# Altium PCB PCB1.PcbDoc
Units mm, origin at the board's own origin, x right, y up, seen from the top; angles counter-clockwise.
Board outline 100 x 90 mm, 2 copper layers (Top Layer, Bottom Layer); 72 components, 52 nets, 262 pads, 12 vias.
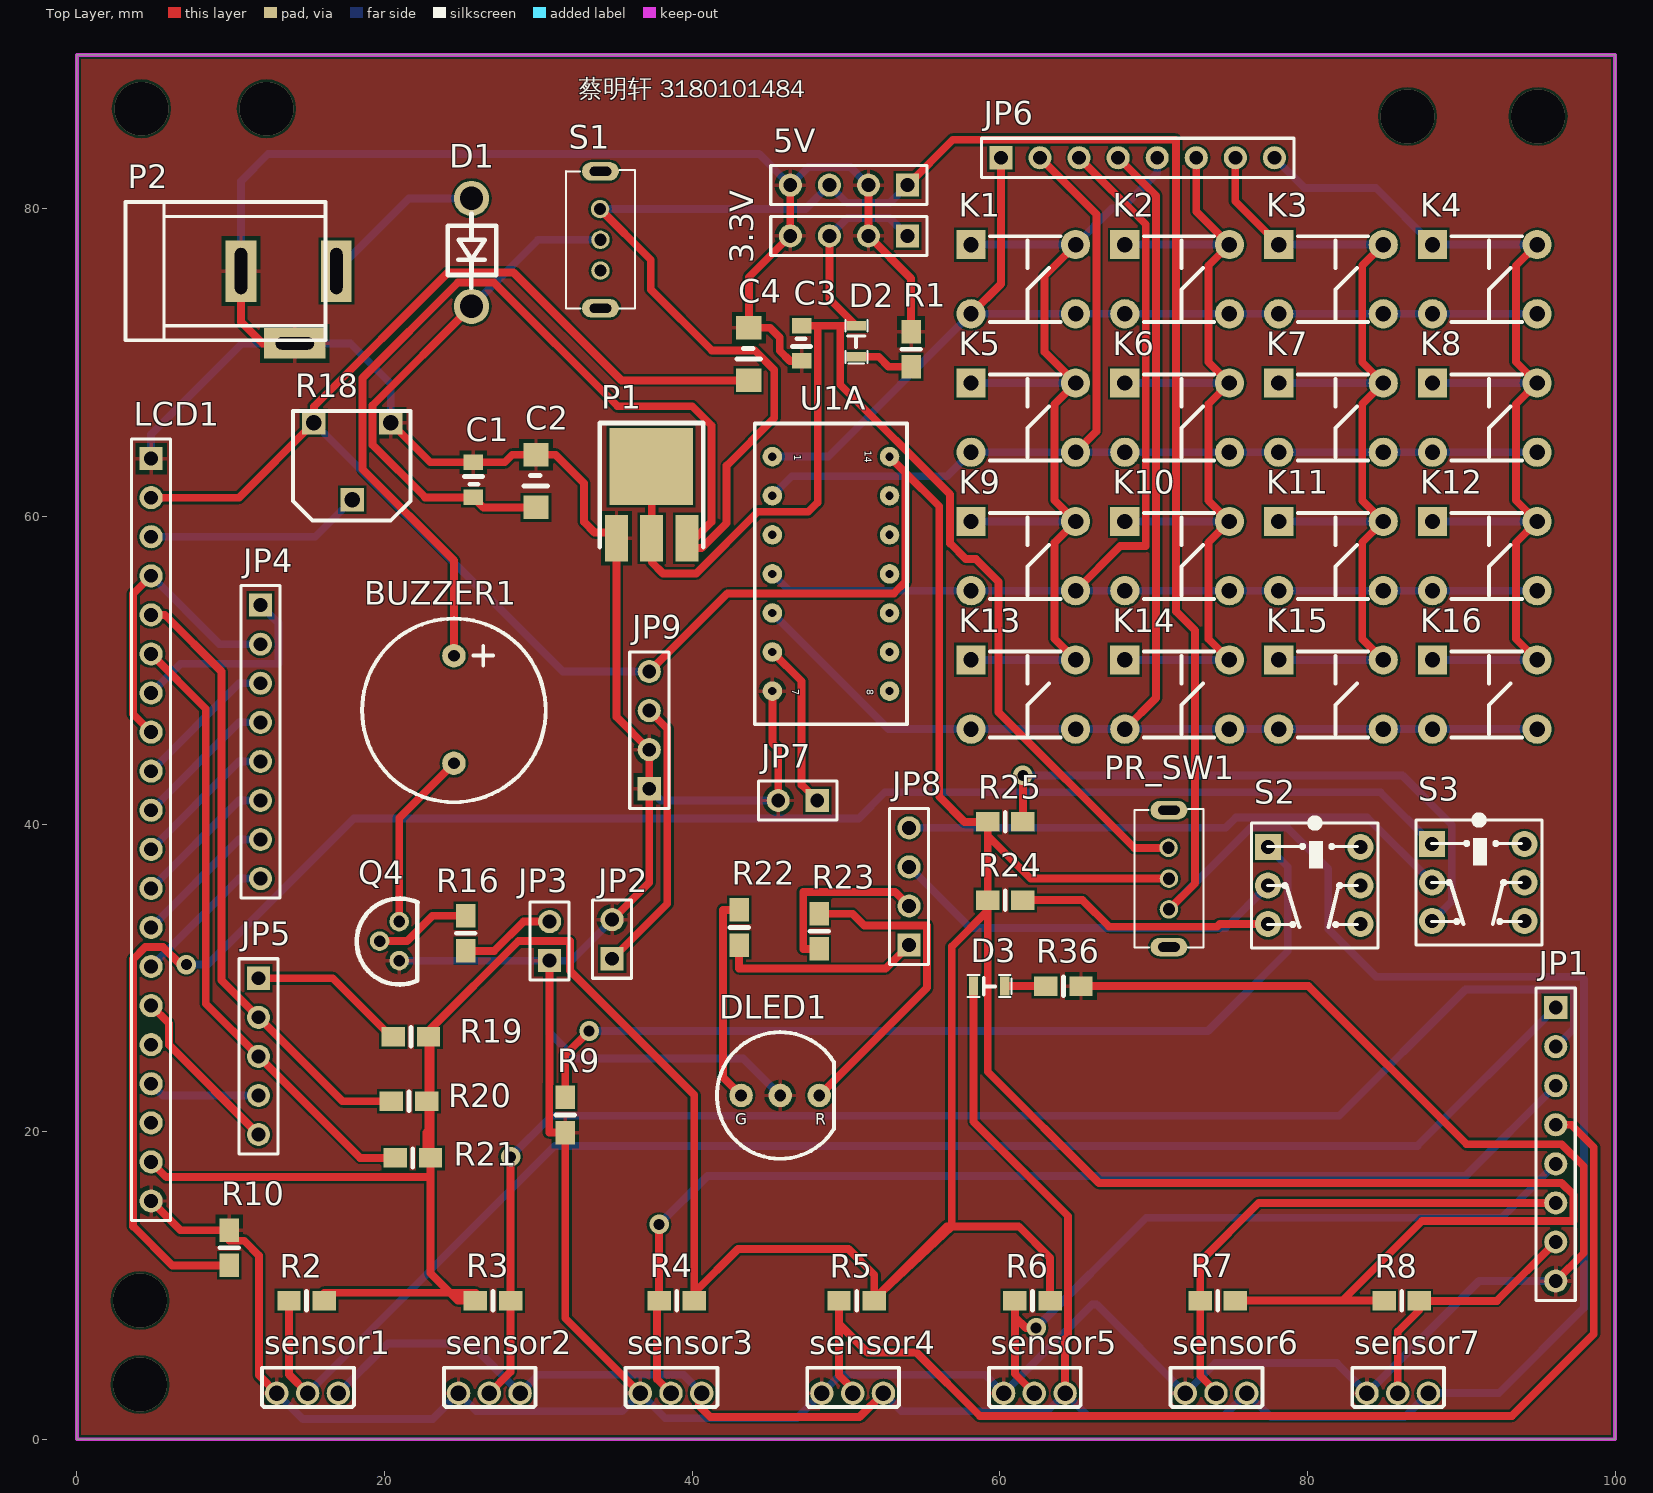
[diagram p0: Top Layer view]
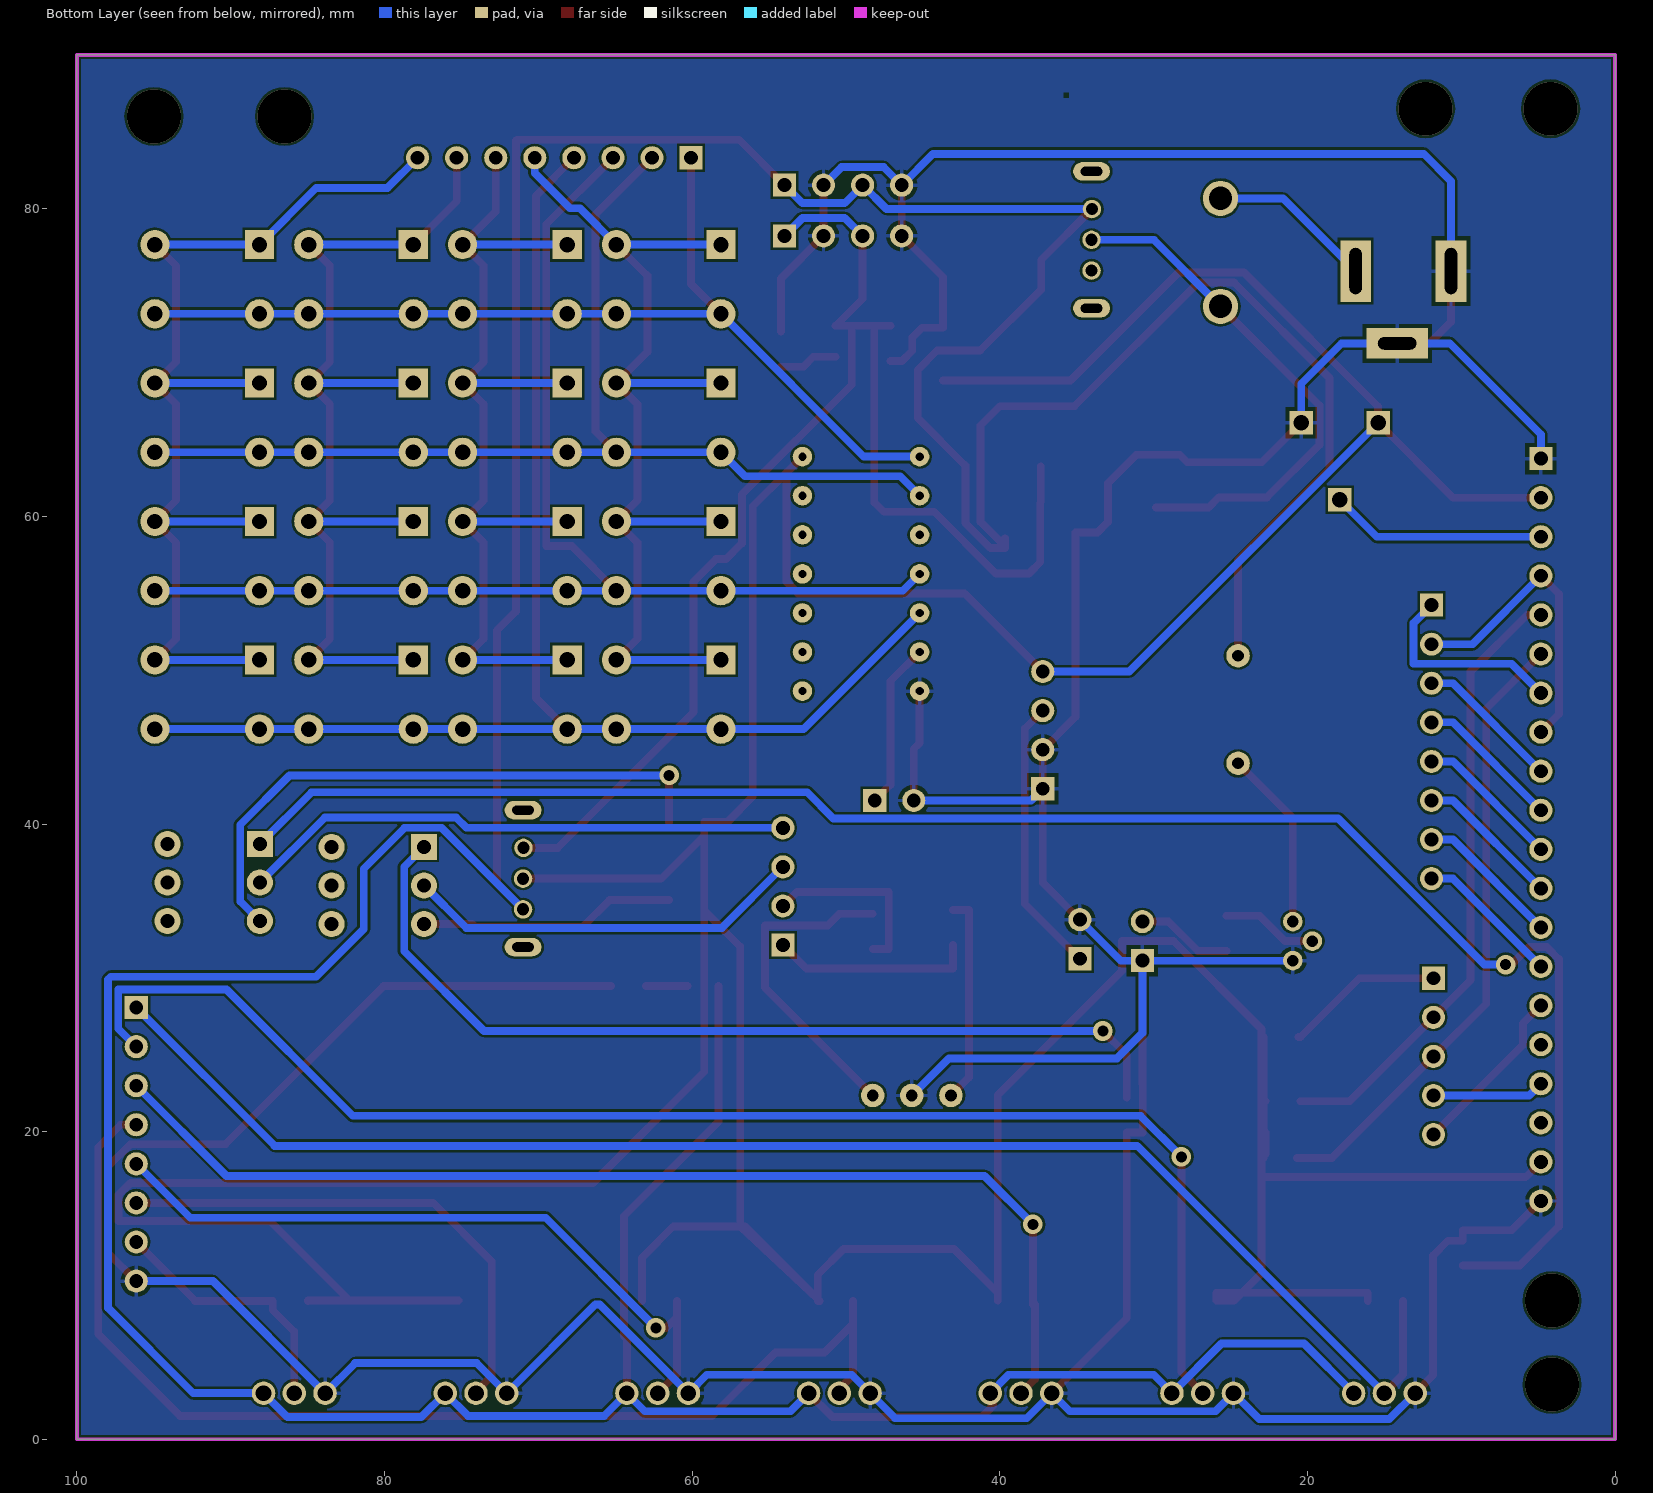
[diagram p1: Bottom Layer view, seen from below]
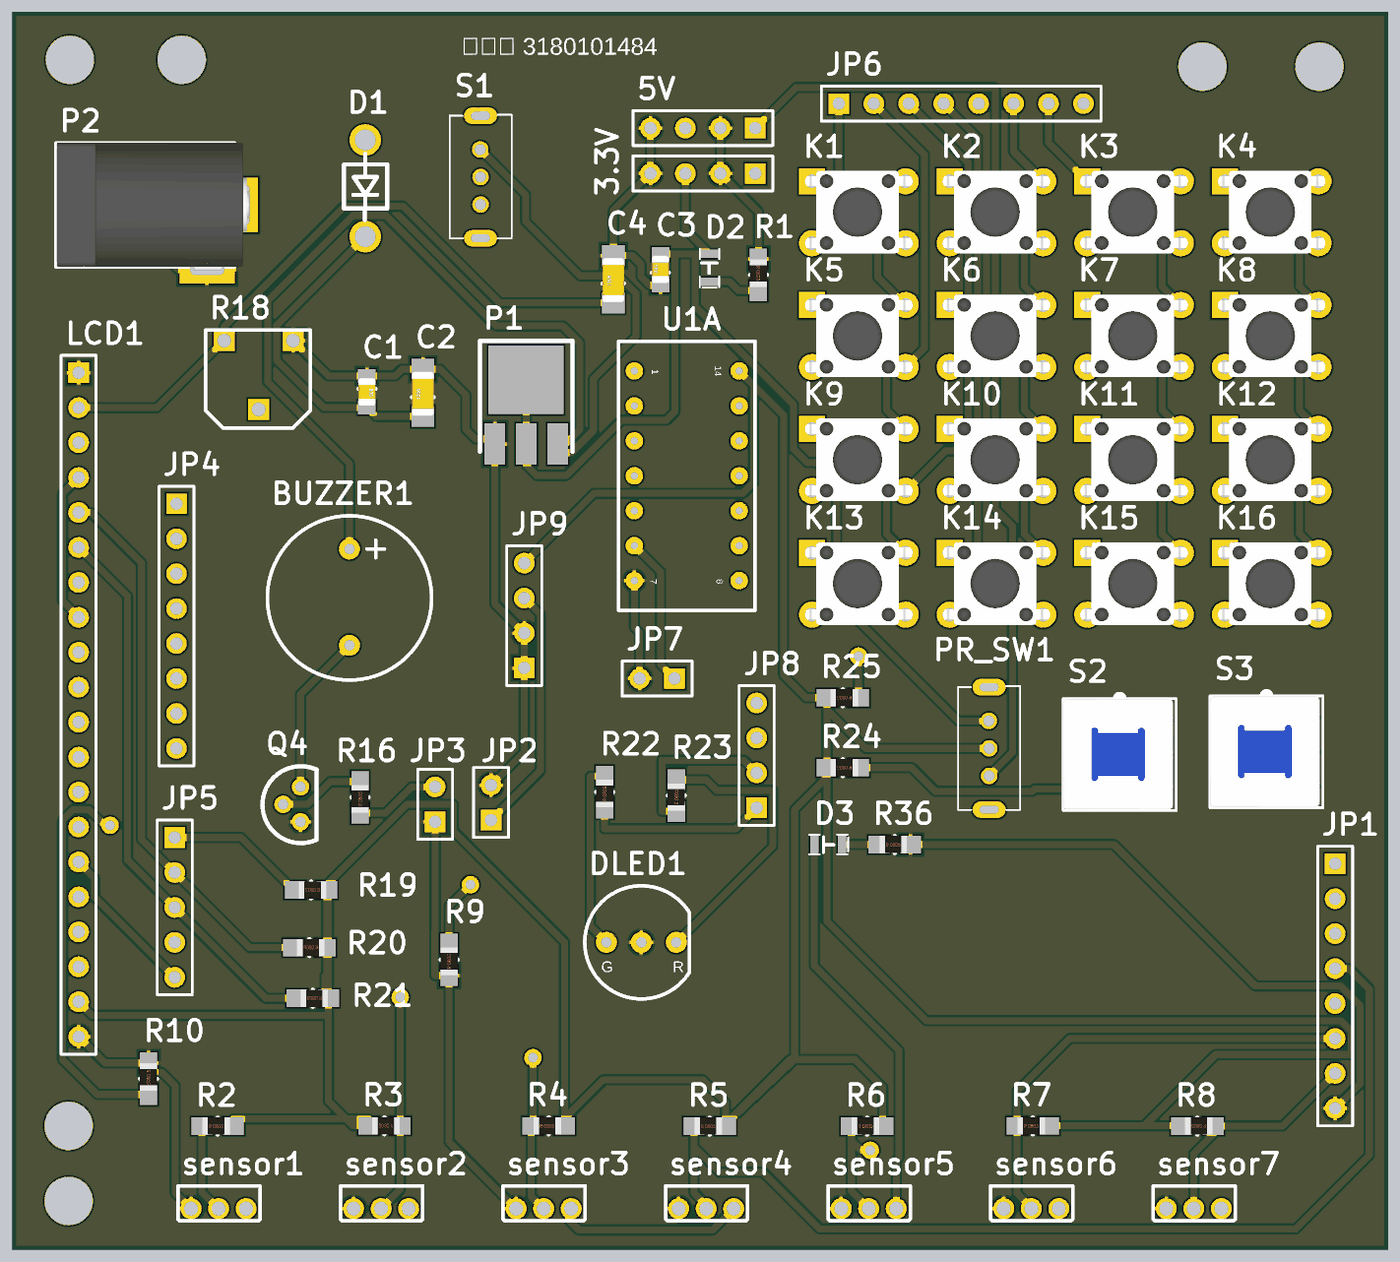
[diagram p2: 3D render of the assembled board from above, using the file's embedded part models]

## Layer stack, top to bottom
Top Solder: solder mask 0.0102, Solder Resist, Dk 3.5
Top Layer: signal copper 0.0356
Dielectric 1: dielectric 0.32, FR-4, Dk 4.8
Bottom Layer: signal copper 0.0356
Bottom Solder: solder mask 0.0102, Solder Resist, Dk 3.5

## Board outline
0,0 0,90 100,90 100,0

## Design rules (kind name [scope] priority, off if disabled: settings)
Clearance [All] p1: gap=0.152 ignorepadtopadclearanceinfootprint=FALSE
HoleSize [All] p1 off: absolutevalues=TRUE maxlimit=2.54 minlimit=0.025 maxpercent=80.000 minpercent=20.000
PolygonConnect [All] p1: connectstyle=Relief reliefconductorwidth=0.254 reliefentries=4 polygonreliefangle="90 Angle" airgapwidth=0.254
RoutingVias [All] p1: holewidth=0.711 width=1.27 viastyle="Through Hole" minholewidth=0.711 minwidth=1.27 maxholewidth=0.711 maxwidth=1.27
SMDNeckDown [All] p1: percent=100.000
SilkToSilkClearance [All] p1 off: silktosilkclearance=0.254
SilkToSolderMaskClearance [IsPad] p1 off: minsilkscreentomaskgap=0.254 clearancetoexposedcopper=TRUE
SolderMaskExpansion [All] p1: expansion=0.102
Width [All] p1: maxlimit=0.508 minlimit=0.508 preferedwidth=0.508
27 further rules are at their usual default settings.

## Components (designator, comment, footprint, x,y, rotation, side; value= is the part's Value field where it differs from the comment)
3.3V "3.3V" HDR1X4 54,78.232 r180 top
5V "GND" HDR1X4 54,81.534 r180 top
BUZZER1 "Bell" BUZZER 24.511,50.942 r270 top
C1 "0.1uF" 0805C 25.781,63.5 r270 top
C2 "10uF" 1206C 29.845,60.579 r90 top
C3 "0.1uF" 0805C 47.107,70.122 r90 top
C4 "10uF" 1206C 43.688,68.834 r90 top
D1 "1N4147" DIODE0.3 25.654,80.645 r270 top
D2 "3.3V_LED" LED0805 50.673,72.39 r270 top
D3 "5V_LED" LED0805 58.293,29.464 r0 top
DLED1 "DLED" "DColor LED" 45.72,22.352 r0 top
JP1 "OPT_I/O" HDR1X8 96.139,28.067 r270 top
JP2 "DA" HDR1X2 34.798,31.242 r90 top
JP3 "BEEP" HDR1X2 30.734,31.115 r90 top
JP4 "LCD_DATA" HDR1X8 11.938,54.229 r270 top
JP5 "LCD_CTRL" HDR1X5 11.811,29.972 r270 top
JP6 "KEY_PORT" HDR1X8 60.071,83.312 r0 top
JP7 "K_INT" HDR1X2 48.133,41.529 r180 top
JP8 "LED_SW" HDR1X4 54.102,32.131 r90 top
JP9 "喇叭驱动模块" HDR1X4 37.211,42.291 r90 top
K1 "KEY_01" DIP-6X6X5 58.127,77.667 r0 top
K2 "KEY_02" DIP-6X6X5 68.127,77.667 r0 top
K3 "KEY_03" DIP-6X6X5 78.127,77.667 r0 top
K4 "KEY_04" DIP-6X6X5 88.127,77.667 r0 top
K5 "KEY_05" DIP-6X6X5 58.127,68.667 r0 top
K6 "KEY_06" DIP-6X6X5 68.127,68.667 r0 top
K7 "KEY_07" DIP-6X6X5 78.127,68.667 r0 top
K8 "KEY_08" DIP-6X6X5 88.127,68.667 r0 top
K9 "KEY_09" DIP-6X6X5 58.127,59.667 r0 top
K10 "KEY_10" DIP-6X6X5 68.127,59.667 r0 top
K11 "KEY_11" DIP-6X6X5 78.127,59.667 r0 top
K12 "KEY_12" DIP-6X6X5 88.127,59.667 r0 top
K13 "KEY_13" DIP-6X6X5 58.127,50.667 r0 top
K14 "KEY_14" DIP-6X6X5 68.127,50.667 r0 top
K15 "KEY_15" DIP-6X6X5 78.127,50.667 r0 top
K16 "KEY_16" DIP-6X6X5 88.127,50.667 r0 top
LCD1 "LCD" HDR1X20 4.826,63.754 r270 top
P1 "NCP1117-3.3" DPAK1 35.077,58.598 r0 top
P2 "DC5" DC-005 16.868,75.946 r180 top
PR_SW1 "SS12D07VG5" SS12D07VG3 70.993,34.449 r90 top
Q4 "2N3904" TO-92A 20.955,33.655 r270 top
R1 "5.1K" 0805R 54.229,72.009 r270 top
R2 "10K" 0805R 13.789,9 r0 top
R3 "10K" 0805R 28.194,9.017 r180 top
R4 "10K" 0805R 37.846,9.017 r0 top
R5 "10K" 0805R 49.546,9 r0 top
R6 "10K" 0805R 60.979,9 r0 top
R7 "10K" 0805R 73.025,9.017 r0 top
R8 "10K" 0805R 87.266,9 r180 top
R9 "5.1K" 0805R 31.75,19.939 r90 top
R10 "5.1K" 0805R 9.906,13.589 r270 top
R16 "5.1K" 0805R 25.273,31.75 r90 top
R18 "蓝白电位器" RM065 20.407,66.087 r180 top value=10K
R19 "5.1K" 0805R 22.86,26.162 r180 top
R20 "5.1K" 0805R 22.733,21.971 r180 top
R21 "5.1K" 0805R 22.987,18.288 r180 top
R22 "330" 0805R 43.053,32.131 r90 top
R23 "5.1K" 0805R 48.26,31.877 r90 top
R24 "5.1K" 0805R 61.5,35.052 r180 top
R25 "5.1K" 0805R 61.5,40.132 r180 top
R36 "5.1K" 0805R 62.992,29.464 r0 top
S1 "SS12D07VG5" SS12D07VG3 34.036,75.978 r90 top
S2 "8*8mm自锁开关" "KFT DIP-8X8" 77.439,38.5 r0 top
S3 "8*8mm自锁开关" "KFT DIP-8X8" 88.107,38.695 r0 top
sensor1 "IS0103" IS0103 17,3 r180 top
sensor2 "IS0103" IS0103 28.811,3 r180 top
sensor3 "IS0103" IS0103 40.622,3 r180 top
sensor4 "IS0103" IS0103 52.433,3 r180 top
sensor5 "IS0103" IS0103 64.244,3 r180 top
sensor6 "IS0103" IS0103 76.055,3 r180 top
sensor7 "IS0103" IS0103 87.866,3 r180 top
U1A "SN74HC21" 74HC21D 45.212,63.881 r270 top

## Footprints (in the part's own frame and the unit in brackets; to place one, negate y for a bottom-side part, rotate by r counter-clockwise, add the part's x,y. Pads: shape width x height; smd on the part's side, far side on the other; paste and mask are expansions set on the pad)
74HC21D [mil] "SN74HC21D"
  round 50 hole 21: 1(0,0) 2(100,0) 3(200,0) 4(300,0) 5(400,0) 6(500,0) 7(600,0) 8(600,300) 9(500,300) 10(400,300) 11(300,300) 12(200,300) 13(100,300) 14(0,300)
  silkscreen extent -85,-45 685,345
0805C [mm]
  rect 1x1.27 smd: 1(-0.018,-0.01) 2(2.268,-0.01)
  silkscreen extent 0.91,-0.6 1.42,0.61, body extent 0.14,-0.62 2.14,0.63, height 0.78
0805R [mil]
  rect 60x50 smd: 1(0,0) 2(90,0)
  silkscreen extent 45,-24 45,24, body extent 1,-25 80,25, height 15
1206C [mil]
  rect 60x64.96 smd: 1(0,0) 2(135,0)
  silkscreen extent 55,-30 82,31, body extent 2,-31 128,32, height 39
BUZZER [mil]
  round 60 hole 30: 1(0,0) 2(275.59,0)
  silkscreen extent -95,-235 375,235
DC-005 [mm]
  rect 2x4 hole 0.8 slot 3 at 90 deg: 1(0,0) 2(6.2,0)
  rect 4x2 hole 0.8 slot 2.5 at 0 deg: 3(2.7,4.7)
  silkscreen extent 0.72,-4.5 13.7,4.5, body extent -0.4,-4.52 13.65,4.78, height 11.2
"DColor LED" [mil]
  round 60 hole 30: 1(0,0) 2(-100,0) 3(100,0)
  silkscreen extent -162,-162 138,162
DIODE0.3 [mil]
  round 90 hole 60: 1(-1,0) 2(275.59,0)
  silkscreen extent 39,-61 228,63, body extent 36,-61 233,66, height 118
DIP-6X6X5 [mm]
  rect 1.9x1.9 hole 1: 1(0,0)
  round 1.9 hole 1: 2(6.8,0) 3(6.8,-4.5) 4(0,-4.5)
  silkscreen extent 1.24,-5.04 5.81,0.54, body extent -0.8,-5.24 7.41,0.76, height 4.95
DPAK1 [mm]
  rect 1.5x3 smd: 1(0,-0.025) 2(2.29,-0.025) 3(4.58,-0.025)
  rect 5.45x5 smd: 4(2.261,4.648)
  silkscreen extent -1.09,-0.58 5.64,7.47, body extent -1.11,1.37 5.66,7.53, height 2.8
HDR1X2 [mm]
  rect 1.5x1.5 hole 0.9: 1(0,0)
  round 1.5 hole 0.9: 2(2.54,0)
  silkscreen extent -1.27,-1.27 3.81,1.27
HDR1X4 [mm]
  rect 1.5x1.5 hole 0.9: 1(0,0)
  round 1.5 hole 0.9: 2(2.54,0) 3(5.08,0) 4(7.62,0)
  silkscreen extent -1.27,-1.27 8.89,1.27
HDR1X5 [mm]
  rect 1.5x1.5 hole 0.9: 1(0,0)
  round 1.5 hole 0.9: 2(2.54,0) 3(5.08,0) 4(7.62,0) 5(10.16,0)
  silkscreen extent -1.27,-1.27 11.43,1.27
HDR1X8 [mm]
  rect 1.5x1.5 hole 0.9: 1(0,0)
  round 1.5 hole 0.9: 2(2.54,0) 3(5.08,0) 4(7.62,0) 5(10.16,0) 6(12.7,0) 7(15.24,0) 8(17.78,0)
  silkscreen extent -1.27,-1.27 19.05,1.27
HDR1X20 [mm]
  rect 1.5x1.5 hole 0.9: 1(0,0)
  round 1.5 hole 0.9: 2(2.54,0) 3(5.08,0) 4(7.62,0) 5(10.16,0) 6(12.7,0) 7(15.24,0) 8(17.78,0) 9(20.32,0) 10(22.86,0) 11(25.4,0) 12(27.94,0) 13(30.48,0) 14(33.02,0) 15(35.56,0) 16(38.1,0) 17(40.64,0) 18(43.18,0) 19(45.72,0) 20(48.26,0)
  silkscreen extent -1.27,-1.27 49.53,1.27
IS0103 [mil]
  round 60 hole 40: 1(0,0) 2(78.74,0) 3(157.48,0)
  silkscreen extent -40,-65 195,35
"KFT DIP-8X8" [mm]
  rect 1.7x1.7 hole 0.9: 1(0,0)
  round 1.7 hole 0.9: 2(0,-2.5) 3(0,-5) 4(6,-5) 5(6,-2.5) 6(6,0)
  silkscreen extent -1.06,-6.56 7.15,1.76, body extent -1.08,-6.48 6.92,1.52, height 13.1
LED0805 [mm]
  rect 0.6x1.25 smd: 1(0,0) 2(2.02,0)
  silkscreen extent -0.38,-0.71 2.46,0.71, body extent 0.12,-0.69 1.91,0.69, height 1.4
RM065 [mil]
  rect 60x60 hole 39.37: 1(0,0) 2(98.43,196.85) 3(196.85,0)
  silkscreen extent -50,-30 250,250
SS12D07VG3 [mm]
  oval 1.2x2.4 hole 0.6 slot 1.4 at 90 deg: 0(-2.45,0) 0(6.45,0)
  round 1.2 hole 0.8: 1(0,0) 2(2,0) 3(4,0.025)
  silkscreen extent -2.46,-2.26 6.53,2.25, body extent -2.46,-2.29 6.58,2.25, height 5.5
TO-92A [mil]
  round 50 hole 30: 1(0,0) 2(50,-50) 3(100,0)
  silkscreen extent -59,-109 161,47

## Part data
3.3V JP8 JP9: library part "Header 4", "Header, 4-Pin", LatestRevisionDate=17-Jul-2002, LatestRevisionNote="Re-released for DXP Platform.", Publisher="Altium Limited"
5V: library part "Header 4H", "Header, 4-Pin, Right Angle", LatestRevisionDate=17-Jul-2002, LatestRevisionNote="Re-released for DXP Platform.", Publisher="Altium Limited"
BUZZER1: "Electrical Bell", LatestRevisionDate=17-Jul-2002, LatestRevisionNote="Re-released for DXP Platform.", PackageReference=PIN2, Published=24-Mar-1999, Publisher="Altium Limited"
C1 C3: library part Cap, "Capacitor", LatestRevisionDate=17-Jul-2002, LatestRevisionNote="Re-released for DXP Platform.", PackageReference=RAD-0.3, Published=8-Jun-2000, Publisher="Altium Limited"
C2 C4: library part "Cap Pol1", "Polarized Capacitor (Radial)", LatestRevisionDate=17-Jul-2002, LatestRevisionNote="Re-released for DXP Platform.", PackageReference=RB7.6-15, Published=8-Jun-2000, Publisher="Altium Limited"
D1: library part "Diode 1N4007", "1 Amp General Purpose Rectifier", PackageDocument=Aug-1999, Code_JEDEC=DO-204-AL, ComponentLink1Description="Manufacturer Link", ComponentLink1URL=http://www.fairchildsemi.com/, ComponentLink2Description=Datasheet, ComponentLink2URL=http://www.fairchildsemi.com/ds/1N%2F1N4001.pdf, DatasheetDocument=1998, LatestRevisionDate=17-Jul-2002, LatestRevisionNote="Re-released for DXP Platform.", PackageReference=DO-41, Published=8-Jun-2000, Publisher="Altium Limited"
D2 D3: library part LED_1
JP1 JP4 JP6: library part "Header 8", "Header, 8-Pin", LatestRevisionDate=17-Jul-2002, LatestRevisionNote="Re-released for DXP Platform.", Publisher="Altium Limited"
JP2 JP3: library part "Header 2", "Header, 2-Pin", LatestRevisionDate=17-Jul-2002, LatestRevisionNote="Re-released for DXP Platform.", Publisher="Altium Limited"
JP5: library part "Header 5", "Header, 5-Pin", LatestRevisionDate=17-Jul-2002, LatestRevisionNote="Re-released for DXP Platform.", Publisher="Altium Limited"
JP7: library part "Header 2H", "Header, 2-Pin, Right Angle", LatestRevisionDate=17-Jul-2002, LatestRevisionNote="Re-released for DXP Platform.", Publisher="Altium Limited"
K1 K2 K3 K4 K5 K6 K7 K8 K9 K10 K11 K12 K13 K14 K15 K16: library part KEY, "B3F-1055"
LCD1: library part COMPONENT_1_1
P1: library part NCP1117
P2: library part DC_Socket, "DC-005方口电源插座"
PR_SW1 S1: library part "SW SPDT"
Q4: "NPN General Purpose Amplifier", Code_JEDEC=TO-92A, ComponentLink1Description="Manufacturer Link", ComponentLink1URL=http://www.fairchildsemi.com/, ComponentLink2Description=Datasheet, ComponentLink2URL=http://www.fairchildsemi.com/ds/2N%2F2N3904.pdf, DatasheetVersion=1997, LatestRevisionDate=15-Jan-2003, LatestRevisionNote="PCB Footprint 'BCY-W3/D4.7' replaced", PackageReference=TO-92A, PackageVersion=Sep-1998, Published=8-Jun-2000, Publisher="Altium Limited"
R1 R2 R3 R4 R5 R6 R7 R8 R9 R10 R16 R19 R20 R21 R22 R23 R24 R25: library part R-10K, "resistor"
R18: library part RPot, "Potentiometer", LatestRevisionDate=17-Jul-2002, LatestRevisionNote="Re-released for DXP Platform.", PackageDescription="Variable Resistor, Thru-Hole; 3 Leads", PackageReference=VR5, Published=8-Jun-2000, Publisher="Altium Limited", Set Position=0.5, Sim Note="Enter the Resistance value and the set point into parameter fields."
R36: library part RES2
S2 S3: library part "KFT DIP-8X8"
sensor1 sensor2 sensor3 sensor4 sensor5 sensor6 sensor7: library part "Header 3", "Header, 3-Pin", LatestRevisionDate=17-Jul-2002, LatestRevisionNote="Re-released for DXP Platform.", Publisher="Altium Limited"
U1A: library part 74HC21

## Via types
v1: diameter 3.5, hole 3.5, Top Layer to Bottom Layer, 6 vias
v2: diameter 1.27, hole 0.711, Top Layer to Bottom Layer, 6 vias

## Nets (pads, with @x,y where several pads share a name; then routed paths per layer and width w, separated by ;. In a path a pad name is that pad's centre, name@x,y a point inside that pad or via, vN(x,y) a via of type N, cw(c..) or ccw(c..) an arc to the next point about the centre after c; other vN are vias at no path point)
BUZZER: JP3.2 R16.1 | length 6.3
  Top Layer w0.508: R16.1 27.127,31.75 29.032,33.655 JP3.2
D0: JP4.1 LCD1.7 | length 13.4
  Bottom Layer w0.508: LCD1.7 6.731,50.419 13.106,50.419 13.106,53.061 JP4.1
D1: JP4.2 LCD1.4 LCD1.8 | length 20.1
  Top Layer w0.508: LCD1.8 3.658,47.142 3.658,54.966 LCD1.4
  Bottom Layer w0.508: LCD1.4 9.271,51.689 JP4.2
D2: JP4.3 LCD1.9 | length 9.5
  Bottom Layer w0.508: LCD1.9 10.541,49.149 JP4.3
D3: JP4.4 LCD1.10 | length 9.5
  Bottom Layer w0.508: LCD1.10 10.541,46.609 JP4.4
D4: JP4.5 LCD1.11 | length 9.5
  Bottom Layer w0.508: LCD1.11 10.541,44.069 JP4.5
D5: JP4.6 LCD1.12 | length 9.5
  Bottom Layer w0.508: LCD1.12 10.541,41.529 JP4.6
D6: JP4.7 LCD1.13 | length 9.5
  Bottom Layer w0.508: LCD1.13 10.541,38.989 JP4.7
D7: JP4.8 LCD1.14 | length 9.5
  Bottom Layer w0.508: LCD1.14 10.541,36.449 JP4.8
DA: JP2.1 JP9.3 | length 18.1
  Top Layer w0.508: JP2.1 38.379,34.823 38.379,46.203 JP9.3
DI: JP5.1 R19.2 | length 10.3
  Top Layer w0.508: JP5.1 16.637,29.972 20.447,26.162 R19.2
E: JP5.3 LCD1.6 R21.2 | length 40.7
  Top Layer w0.508: LCD1.6 8.382,47.498 8.382,28.321 JP5.3 18.415,18.288 20.574,18.288 R21.2
GND: 3.3V.2 3.3V.4 5V.2 5V.4 C1.1 C2.2 C3.1 C4.2 DLED1.1 JP1.8 JP2.2 JP3.1 JP7.2 JP9.1 JP9.2 LCD1.1 LCD1.20 P1.1 P2.2 P2.3 Q4.3 R1.1 R9.1 R10.1 R18.1 R36.2 sensor1.3 sensor2.3 sensor3.3 sensor4.3 sensor5.3 sensor6.3 sensor7.3 U1A.7 | length 397
  Top Layer w0.508: LCD1.20 6.731,13.589 R10.1 9.906,12.903 10.871,12.903 11.836,11.938 11.836,4.164 sensor1.3 ; P2.2 10.668,72.643 12.065,71.246 P2.3 ; R18.1 22.976,63.518 C1.1 27.813,63.518 28.303,64.008 C2.2 31.115,64.008 32.969,62.154 32.969,59.639 33.655,58.953 35.077,58.953 P1.1 35.077,46.965 JP9.2 JP9.1 37.211,36.195 JP2.2 ; JP3.1 30.734,23.139 30.709,23.114 30.709,19.939 R9.1 31.75,7.872 sensor3.3 ; U1A.7 45.212,45.263 45.593,44.882 JP7.2 ; 5V.4 3.3V.4 43.688,75.54 C4.2 45.06,72.263 45.695,71.628 45.695,70.764 46.355,70.104 C3.1 ; 5V.2 3.3V.2 54.229,75.463 R1.1 ; R36.2 80.061,29.464 90.348,19.177 96.52,19.177 97.956,17.741 97.956,12.104 JP1.8
  Bottom Layer w0.508: LCD1.1 4.826,65.328 10.744,71.246 P2.3 17.78,71.246 20.407,68.619 R18.1 ; P2.2 10.668,81.788 12.446,83.566 44.348,83.566 5V.4 47.548,82.702 50.292,82.702 5V.2 ; sensor1.3 14.679,1.321 23.132,1.321 sensor2.3 25.982,1.829 35.451,1.829 sensor3.3 38.25,1.372 46.805,1.372 sensor4.3 49.624,4.191 59.053,4.191 sensor5.3 66.007,8.763 66.292,8.763 sensor6.3 74.008,4.953 81.913,4.953 sensor7.3 91.153,10.287 JP1.8 ; Q4.3 JP3.1 ; JP2.2 32.131,31.115 JP3.1 ; JP9.1 37.973,41.529 JP7.2 ; DLED1.1 43.307,24.765 32.385,24.765 30.734,26.416 JP3.1
KEYINT: JP7.1 U1A.6 | length 10.9
  Top Layer w0.508: U1A.6 47.117,49.276 47.117,42.545 JP7.1
LED1: JP8.1 R22.1 | length 13.2
  Top Layer w0.508: R22.1 43.053,30.607 52.578,30.607 JP8.1
LED2: JP8.2 R23.1 | length 12
  Top Layer w0.508: R23.1 47.219,31.877 47.219,35.585 53.188,35.585 JP8.2
NetBUZZER1_2: BUZZER1.2 Q4.1 | length 11.8
  Top Layer w0.508: Q4.1 20.955,40.386 BUZZER1.2
NetC1_2: C1.2 C2.1 D1.2 S1.2 | length 34.1
  Top Layer w0.508: D1.2 19.228,67.219 19.228,64.643 22.639,61.232 C1.2 26.424,60.579 C2.1
  Bottom Layer w0.508: D1.2 29.987,77.978 S1.2
NetD1_1: D1.1 P2.1 | length 10.7
  Bottom Layer w0.508: P2.1 21.592,80.67 D1.1
NetD2_2: D2.2 R1.2 | length 3.8
  Top Layer w0.508: D2.2 52.121,70.37 52.768,69.723 R1.2
NetD3_2: D3.2 R36.1 | length 2.7
  Top Layer w0.508: D3.2 R36.1
NetDLED1_2: DLED1.2 R22.2 | length 13.6
  Top Layer w0.508: R22.2 42.012,34.417 42.012,23.52 DLED1.2
NetDLED1_3: DLED1.3 R23.2 | length 21.3
  Top Layer w0.508: DLED1.3 55.27,29.362 55.27,33.401 51.181,33.401 50.419,34.163 R23.2
NetLCD1_3: LCD1.3 R18.2 | length 14.1
  Bottom Layer w0.508: LCD1.3 15.494,58.674 R18.2
NetQ4_2: Q4.2 R16.2 | length 6.3
  Top Layer w0.508: Q4.2 21.463,32.385 23.114,34.036 R16.2
NetR9_2: R9.2 S2.1 | length 59.8
  Top Layer w0.508: R9.2 31.75,24.994 v2(33.299,26.543)
  Bottom Layer w0.508: v2(33.299,26.543) 73.533,26.543 78.715,31.725 78.715,37.224 S2.1
NetR10_2: R10.2 S3.1 | length 116
  Top Layer w0.508: v2(7.112,30.861) 6.731,30.861 5.588,32.004 4.445,32.004 3.658,31.217 3.658,13.843 6.198,11.303 R10.2
  Bottom Layer w0.508: v2(7.112,30.861) 8.509,30.861 18.009,40.361 50.825,40.361 52.527,42.062 84.74,42.062 S3.1
NetR24_1: R24.1 S2.3 | length 16.7
  Top Layer w0.508: R24.1 65.38,35.052 67.107,33.325 74.117,33.325 74.292,33.5 S2.3
NetR25_1: R25.1 S3.3 | length 39
  Top Layer w0.508: R25.1 v2(61.5,43.155)
  Bottom Layer w0.508: v2(61.5,43.155) 86.182,43.155 89.383,39.954 89.383,34.971 S3.3
P1.0: JP6.1 K1.3 K1.4 K2.3 K2.4 K3.3 K3.4 K4.3 K4.4 U1A.1 | length 64.5
  Top Layer w0.508: K1.4 60.071,75.111 JP6.1
  Bottom Layer w0.508: U1A.1 48.841,63.881 K1.4 K1.3 K2.4 K2.3 K3.4 K3.3 K4.4 K4.3
P1.1: JP6.2 K5.3 K5.4 K6.3 K6.4 K7.3 K7.4 K8.3 K8.4 U1A.2 | length 72.1
  Top Layer w0.508: JP6.2 66.283,79.64 66.283,65.523 K5.3
  Bottom Layer w0.508: U1A.2 46.482,62.611 56.571,62.611 K5.4 K5.3 K6.4 K6.3 K7.4 K7.3 K8.4 K8.3
P1.2: JP6.3 K9.3 K9.4 K10.3 K10.4 K11.3 K11.4 K12.3 K12.4 U1A.4 | length 83
  Top Layer w0.508: K9.3 67.832,58.072 69.483,58.072 69.483,78.98 JP6.3
  Bottom Layer w0.508: U1A.4 46.306,55.167 K9.4 K9.3 K10.4 K10.3 K11.4 K11.3 K12.4 K12.3
P1.3: JP6.4 K13.3 K13.4 K14.3 K14.4 K15.3 K15.4 K16.3 K16.4 U1A.5 | length 91.8
  Top Layer w0.508: JP6.4 70.155,80.848 70.155,48.195 K14.4
  Bottom Layer w0.508: U1A.5 52.766,46.167 K13.4 K13.3 K14.4 K14.3 K15.4 K15.3 K16.4 K16.3
P1.4: JP6.5 K1.1 K1.2 K5.1 K5.2 K9.1 K9.2 K13.1 K13.2 | length 66.4
  Top Layer w0.508: K13.2 63.551,52.043 63.551,58.291 K9.2 63.551,61.043 63.551,67.291 K5.2 62.91,70.684 62.91,75.65 K1.2
  Bottom Layer w0.508: K13.1 K13.2 ; K9.1 K9.2 ; K5.1 K5.2 ; K1.1 K1.2 67.295,80.035 67.945,80.035 70.231,82.321 JP6.5
P1.5: JP6.6 K2.1 K2.2 K6.1 K6.2 K10.1 K10.2 K14.1 K14.2 | length 64.1
  Top Layer w0.508: JP6.6 72.771,79.823 K2.2 73.558,76.298 73.558,70.036 K6.2 73.558,67.298 73.558,61.036 K10.2 73.558,58.298 73.558,52.036 K14.2
  Bottom Layer w0.508: K14.1 K14.2 ; K10.1 K10.2 ; K6.1 K6.2 ; K2.1 K2.2
P1.6: JP6.7 K3.1 K3.2 K7.1 K7.2 K11.1 K11.2 K15.1 K15.2 | length 64.4
  Top Layer w0.508: JP6.7 75.311,80.483 K3.1 ; K15.2 83.566,52.028 83.566,58.306 K11.2 83.566,61.028 83.566,67.306 K7.2 83.566,70.028 83.566,76.306 K3.2
  Bottom Layer w0.508: K15.1 K15.2 ; K11.1 K11.2 ; K7.1 K7.2 ; K3.1 K3.2
P1.7: JP6.8 K4.1 K4.2 K8.1 K8.2 K12.1 K12.2 K16.1 K16.2 | length 70.2
  Top Layer w0.508: K16.2 93.548,52.046 93.548,58.288 K12.2 93.548,61.046 93.548,67.288 K8.2 93.548,70.046 93.548,76.288 K4.2
  Bottom Layer w0.508: JP6.8 79.807,81.356 84.438,81.356 K4.1 K4.2 ; K16.1 K16.2 ; K12.1 K12.2 ; K8.1 K8.2
PSW: JP5.5 LCD1.15 | length 11.3
  Top Layer w0.508: LCD1.15 5.994,27.026 5.994,25.629 JP5.5
RST: JP5.4 LCD1.17 | length 7.3
  Bottom Layer w0.508: LCD1.17 5.588,22.352 JP5.4
RW: JP5.2 LCD1.5 R20.2 | length 40.5
  Top Layer w0.508: LCD1.5 5.715,53.594 9.398,49.911 9.398,29.845 JP5.2 17.272,21.971 20.32,21.971 R20.2
S1: JP8.3 S2.2 | length 26.1
  Bottom Layer w0.508: JP8.3 58.064,33.249 74.688,33.249 S2.2
S2: JP8.4 S3.2 | length 36
  Bottom Layer w0.508: JP8.4 74.671,39.751 75.336,40.417 83.885,40.417 S3.2
SYS_VCC: C4.1 JP9.4 LCD1.2 LCD1.19 PR_SW1.2 R2.2 R3.2 R4.2 R5.2 R6.2 R7.2 R8.2 R18.3 R19.1 R20.1 R21.1 R24.2 R25.2 U1A.14 | length 388
  Top Layer w0.508: LCD1.19 5.817,17.043 22.987,17.043 ; LCD1.2 5.461,61.214 10.534,61.214 R18.3 15.407,67.132 24.13,75.855 28.387,75.855 35.408,68.834 C4.1 ; R2.2 16.075,9.525 24.257,9.525 ; R20.1 R20.1@22.86,22.098 ; R19.1 R20.1@22.86,22.098 ; JP9.4 42.291,54.991 53.111,54.991 53.873,55.753 53.873,62.84 ; R4.2 R4.2@40.132,9.525 ; U1A.14 53.873,62.84 ; R6.2 63.265,11.8 61.222,13.843 56.871,13.843 ; PR_SW1.2 62.008,36.449 59.214,39.243 ; R7.2@75.184,9.017 R7.2 82.271,9.017 ; R8.2 84.98,9.017 82.271,9.017 ; 22.86,20.066 22.86,21.971 R20.1@22.86,22.098 ; 22.86,20.066 22.86,18.288 R21.1 ; 22.86,20.066 22.733,19.939 22.733,18.542 R21.1@22.987,18.542 ; 22.987,17.043 R21.1 ; 22.987,17.043 22.987,10.795 24.257,9.525 ; R21.1 R21.1@22.987,18.542 ; R21.1@22.987,18.542 22.987,26.67 28.702,32.385 32.055,32.385 32.055,30.455 40.132,22.377 R4.2@40.132,9.525 ; 24.257,9.525 24.765,9.017 R3.2 25.908,9.525 24.257,9.525 ; R4.2@40.132,9.525 42.977,12.37 50.165,12.37 51.832,10.703 R5.2@51.832,9.127 ; R5.2@51.705,9 51.773,9.063 R5.2@51.832,9.119 ; R5.2@51.705,9 R5.2@51.832,9.127 ; R5.2@51.705,9 R5.2 R5.2@51.832,9.119 ; R5.2@51.832,9.119 56.871,13.843 ; R5.2@51.832,9.119 R5.2@51.832,9.127 ; R5.2@51.832,9.127 56.548,13.843 56.871,13.843 ; 53.873,62.84 56.058,60.655 56.058,41.783 57.709,40.132 R25.2 59.214,39.243 ; 56.871,13.843 56.871,32.029 59.214,34.373 ; 59.214,34.373 R24.2 59.214,39.243 ; 59.214,34.373 59.214,23.895 66.446,16.662 96.52,16.662 97.295,15.887 97.295,14.199 87.452,14.199 82.271,9.017
  Bottom Layer w0.508: R18.3 31.583,49.911 JP9.4
TUBE1: JP1.1 R2.1 sensor1.2 | length 98
  Top Layer w0.508: R2.1 13.789,4.211 sensor1.2
  Bottom Layer w0.508: sensor1.2 31.075,19.075 87.147,19.075 JP1.1
TUBE2: JP1.2 R3.1 sensor2.2 | length 93.7
  Top Layer w0.508: sensor2.2 28.194,4.383 R3.1 v2(28.194,18.364)
  Bottom Layer w0.508: v2(28.194,18.364) 30.861,21.031 82.067,21.031 90.272,29.235 97.307,29.235 97.307,26.695 JP1.2
TUBE3: JP1.3 R4.1 sensor3.2 | length 73.5
  Top Layer w0.508: v2(37.846,13.97) R4.1 37.846,8.763 37.719,8.763 37.719,3.903 sensor3.2
  Bottom Layer w0.508: v2(37.846,13.97) 40.996,17.12 90.272,17.12 JP1.3
TUBE4: JP1.4 R5.1 sensor4.2 | length 75.3
  Top Layer w0.508: R5.1 49.546,7.493 ; sensor4.2 50.433,3.275 49.546,4.162 49.546,7.493 ; JP1.4 97.155,20.447 98.616,18.986 98.616,6.846 93.294,1.524 58.699,1.524 54.585,5.639 51.4,5.639 49.546,7.493
TUBE5: JP1.5 R6.1 sensor5.2 | length 46.4
  Top Layer w0.508: R6.1 60.979,7.957 ; sensor5.2 60.979,4.265 60.979,7.957 ; v2(62.357,7.239) 61.697,7.239 60.979,7.957
  Bottom Layer w0.508: v2(62.357,7.239) 69.52,14.402 92.634,14.402 JP1.5
TUBE6: JP1.6 R7.1 sensor6.2 | length 33.7
  Top Layer w0.508: sensor6.2 74.055,3.095 73.025,4.125 R7.1 73.025,11.557 76.835,15.367 JP1.6
TUBE7: JP1.7 R8.1 sensor7.2 | length 17
  Top Layer w0.508: sensor7.2 85.866,6.999 87.266,8.399 R8.1 92.312,9 JP1.7
VCC: 5V.1 5V.3 BUZZER1.1 D3.1 P1.3 PR_SW1.1 S1.3 sensor1.1 sensor2.1 sensor3.1 sensor4.1 sensor5.1 sensor6.1 sensor7.1 | length 360
  Top Layer w0.508: BUZZER1.1 24.511,57.125 18.567,63.068 18.567,68.997 24.765,75.194 27.117,75.194 35.154,67.158 40.005,67.158 41.25,65.913 41.25,59.63 P1.3@39.657,58.038 ; S1.3 37.313,76.676 37.313,74.752 41.275,70.79 44.069,70.79 45.339,69.52 45.339,66.396 42.24,63.297 42.24,59.563 40.615,57.937 39.657,57.937 P1.3@39.657,58.038 ; P1.3 P1.3@39.657,58.038 ; sensor3.1 40.428,2.806 40.428,2.201 41.18,1.448 50.881,1.448 sensor4.1 ; 5V.1 56.946,84.48 71.399,84.48 71.45,84.43 71.45,53.823 72.695,52.578 72.695,36.151 PR_SW1.1 ; D3.1 58.293,20.65 64.44,14.503 64.44,6.706 64.244,6.51 sensor5.1
  Bottom Layer w0.508: sensor1.1 20.223,6.223 25.588,6.223 sensor2.1 30.002,4.191 39.431,4.191 sensor3.1 ; S1.3 47.364,79.978 5V.3 50.088,80.366 52.832,80.366 5V.1 ; sensor4.1 53.604,1.829 63.073,1.829 sensor5.1 65.72,1.524 74.579,1.524 sensor6.1 77.607,1.448 86.314,1.448 sensor7.1 92.433,3 97.968,8.534 97.968,29.896 97.79,30.074 84.455,30.074 81.356,33.172 81.356,37.096 78.695,39.756 76.3,39.756 PR_SW1.1
VCC33: 3.3V.1 3.3V.3 C3.2 D2.1 P1.2 P1.4 PR_SW1.3 | length 91.4
  Top Layer w0.508: P1.4 37.338,60.913 37.367,60.884 P1.2 37.367,57.019 38.1,56.286 40.259,56.286 44.272,60.3 47.549,60.3 48.158,60.909 48.158,72.39 ; C3.2 48.158,72.39 ; 3.3V.3 48.92,74.143 D2.1 49.632,72.39 ; PR_SW1.3 68.739,38.449 59.919,47.269 59.919,55.753 58.445,57.226 57.785,57.226 56.769,58.242 56.769,61.417 49.632,68.555 49.632,72.39 ; 48.158,72.39 49.632,72.39
  Bottom Layer w0.508: 3.3V.3 50.088,79.4 52.832,79.4 3.3V.1
pads on no net: LCD1.16 LCD1.18 PR_SW1.0 S1.0 S1.1 S2.4 S2.5 S2.6 S3.4 S3.5 S3.6 U1A.3 U1A.8 U1A.9 U1A.10 U1A.11 U1A.12 U1A.13
copper on no net:
  other v1: 4.1,3.556 4.1,9.017 86.5,86 94.996,86 4.191,86.5 12.319,86.5

## Polygon pours and split planes (outlines as drawn)
GND on Bottom Layer (solid, pour order 6): 0,90 0,0 100,0 100,90
GND on Bottom Layer (solid, pour order 4): 5.715,91.186
GND on Bottom Layer (solid, pour order 0): 69.469,136.398
GND on Top Layer (solid, pour order 8): 0,90 0,0 100,0 100,90

## Keep-outs
Keep-Out Layer:
  the board outline again, w0.254

## Other copper
Bottom Layer:

## Silkscreen, mask and mechanical layers (free items; w line width, h text height)
Top Overlay:
  text "蔡明轩 3180101484" at 32.639,86.868 h2

## Text inside footprints (layer, text, board x,y; h text height)
DLED1: Top Overlay "G" at 42.799,20.193 h1.27; Top Overlay "R" at 48.006,20.193 h1.27
U1A: Top Overlay "1" at 46.482,64.008 h0.76 r270; Top Overlay "7" at 46.355,48.768 h0.76 r270; Top Overlay "8" at 51.181,48.768 h0.76 r270; Top Overlay "14" at 51.054,64.262 h0.76 r270